# Altium PCB USBgpib-V3-USBTMC-nomouse.PcbDoc
Units mm, origin at the board's own origin, x right, y up, seen from the top; angles counter-clockwise.
Board outline 53.38 x 15.4 mm, 4 copper layers (Top Layer, Layer 1, Layer 2, Bottom Layer), stack 1.584 mm thick; 32 components, 37 nets, 167 pads, 55 vias.
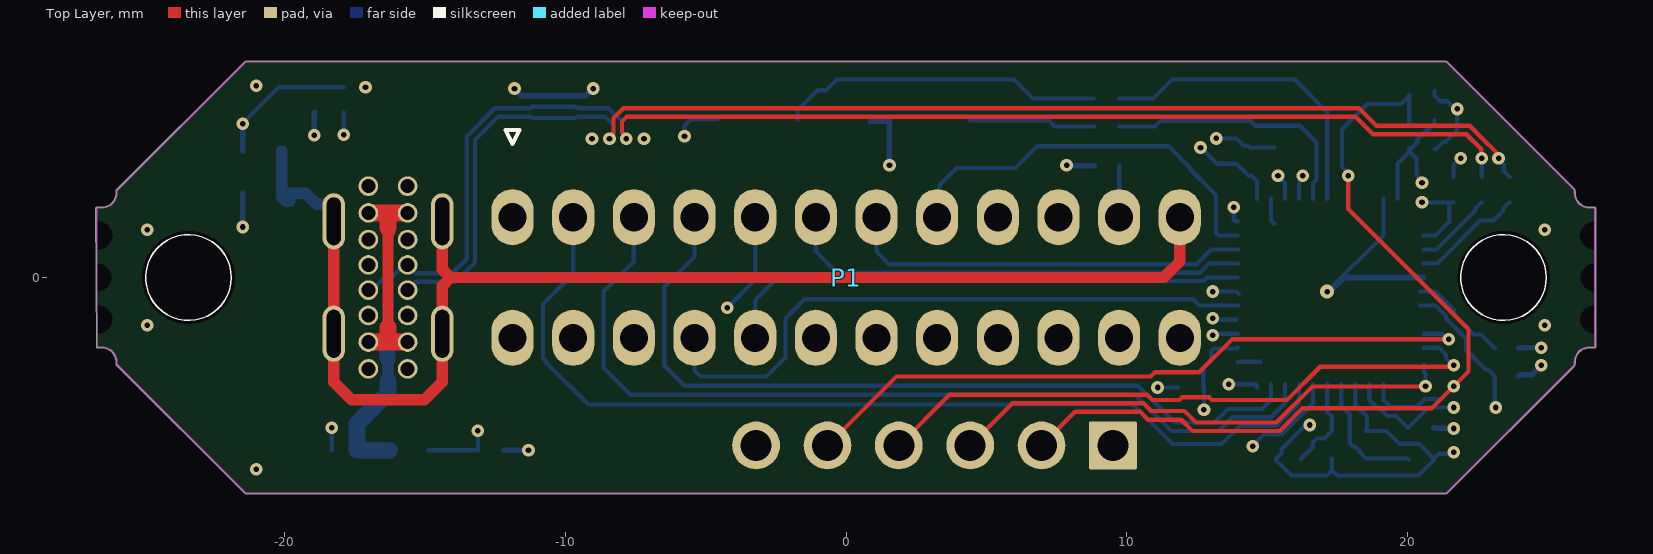
[diagram p0: Top Layer view]
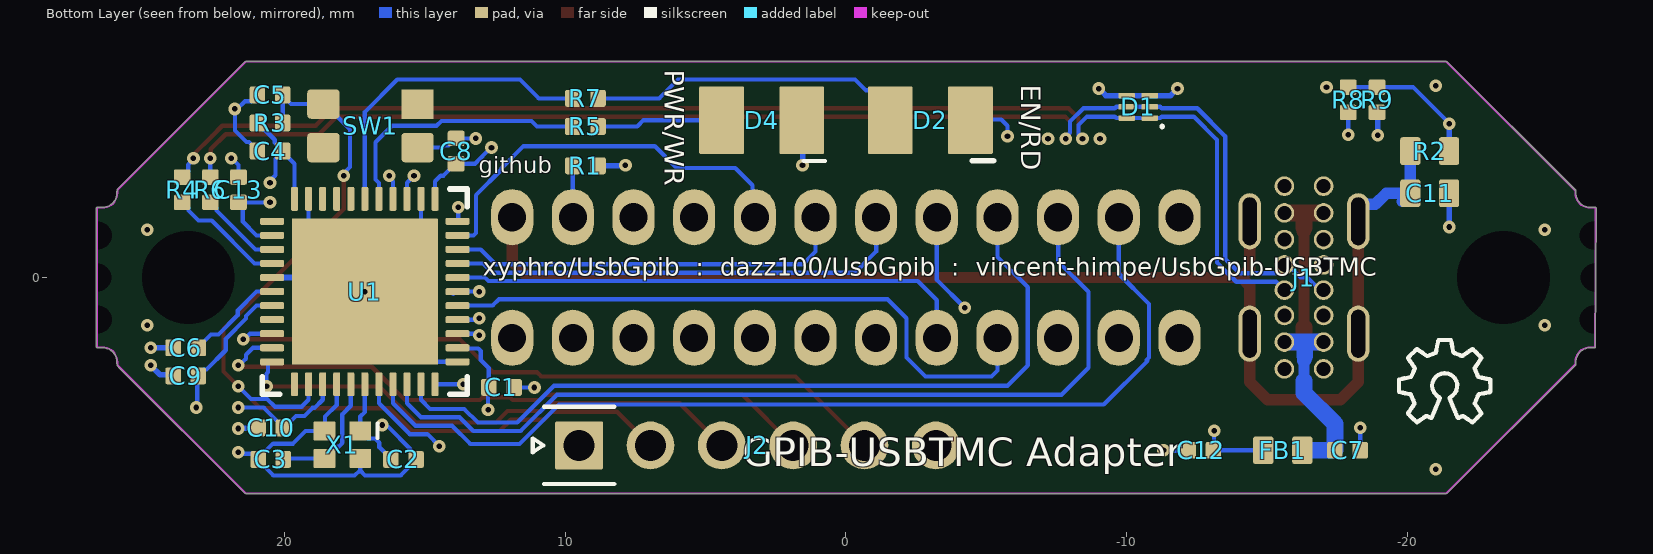
[diagram p1: Bottom Layer view, seen from below]
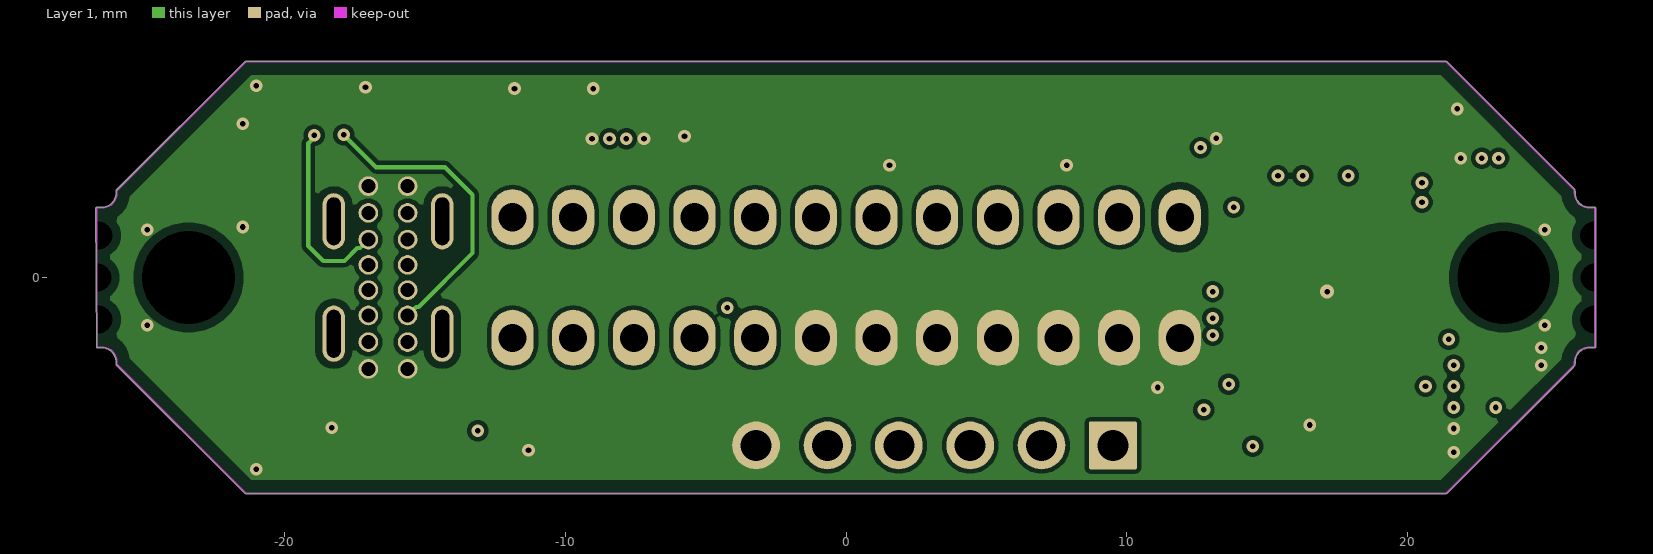
[diagram p2: Layer 1]
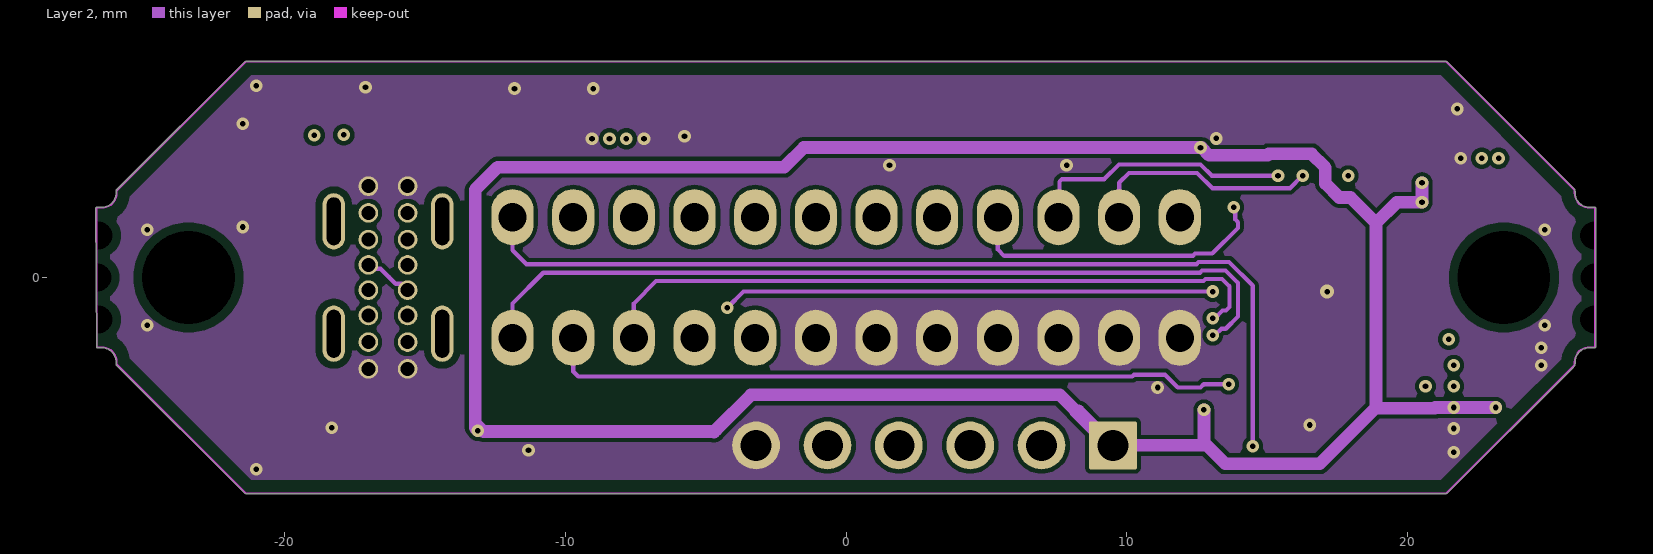
[diagram p3: Layer 2]
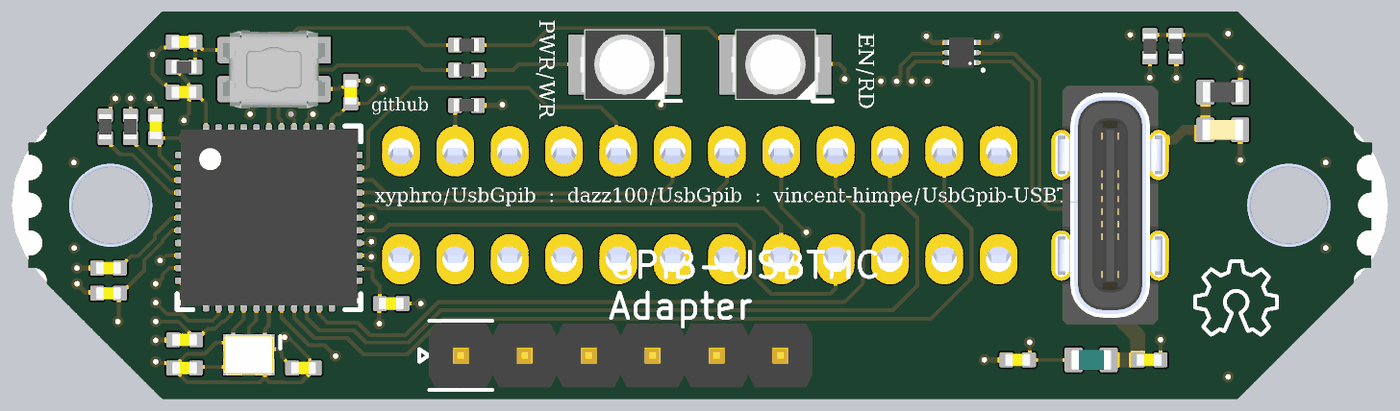
[diagram p4: 3D render of the assembled board from below, using the file's embedded part models]

## Layer stack, top to bottom
Top Solder: solder mask 0.0102, Solder Resist, Dk 3.5
Top Layer: signal copper 0.0356
Dielectric 2: prepreg 0.0711, PP-006, Dk 4.1
Layer 1: signal copper 0.035
Dielectric 1: dielectric 1.3, FR-4, Dk 4.8
Layer 2: signal copper 0.0356
Dielectric 3: prepreg 0.0711, PP-006, Dk 4.1
Bottom Layer: signal copper 0.0356
Bottom Solder: solder mask 0.0102, Solder Resist, Dk 3.5

## Board outline
-26.675,-2.5 -26.485,-2.5 cw(c-26.485,-3.008) -25.977,-3.008 -25.969,-3.109 -21.392,-7.686 -21.357,-7.7 21.357,-7.7 21.393,-7.685 25.826,-3.252 25.945,-3.133 25.952,-3.008 cw(c26.46,-3.008) 26.46,-2.5 26.65,-2.5 26.675,-2.475 26.675,2.475 26.65,2.5 26.46,2.5 cw(c26.46,3.008) 25.952,3.008 25.945,3.133 21.392,7.686 21.357,7.7 -21.357,7.7 -21.393,7.685 -25.97,3.108 -25.977,3.008 cw(c-26.485,3.008) -26.485,2.5 -26.675,2.5 -26.7,2.475

## Design rules (kind name [scope] priority, off if disabled: settings)
Clearance Clearance_3 [InPolygon vs IsThruPin AND (PadIsPlated = FALSE)] p1: gap=0.3 ignorepadtopadclearanceinfootprint=FALSE
Clearance Clearance_2 [InNet('SHIELD')] p2: gap=0.25 ignorepadtopadclearanceinfootprint=FALSE
Clearance Clearance_1 [All vs IsKeepOut] p3: gap=0.45 ignorepadtopadclearanceinfootprint=FALSE
Clearance [All] p4: gap=0.15 ignorepadtopadclearanceinfootprint=FALSE
HoleSize [All] p1: absolutevalues=TRUE maxlimit=10 minlimit=0.025 maxpercent=80.000 minpercent=20.000
MinimumSolderMaskSliver [All] p1: minsoldermaskwidth=0.075
PolygonConnect [All] p1: connectstyle=Direct reliefconductorwidth=0.254 reliefentries=4 polygonreliefangle="90 Angle" airgapwidth=0.254
RoutingVias [All] p1: holewidth=0.2 width=0.45 viastyle="Through Hole" minholewidth=0.2 minwidth=0.45 maxholewidth=0.5 maxwidth=1
SilkToSilkClearance [All] p1: silktosilkclearance=0.15
SilkToSolderMaskClearance [IsPad] p1: minsilkscreentomaskgap=0.1 clearancetoexposedcopper=TRUE
SolderMaskExpansion [All] p1: expansion=0.102 istentingtop=FALSE
SupplyNets "Schematic Supply Nets_4" [InNet('5VP')] p1: voltage=0.000
SupplyNets "Schematic Supply Nets_3" [InNet('SHIELD')] p2: voltage=0.000
SupplyNets "Schematic Supply Nets_2" [InNet('VBUS')] p3: voltage=0.000
SupplyNets "Schematic Supply Nets" [InNet('GND')] p4: voltage=0.000
Width [All] p1: maxlimit=10 minlimit=0.15 preferedwidth=0.15
26 further rules are at their usual default settings.

## Components (designator, comment, footprint, x,y, rotation, side; value= is the part's Value field where it differs from the comment)
C1 "CAP0402" CAPC0402 12.264,-3.912 r180 bottom
C2 "CAP0603" CAPC0402 15.75,-6.475 r180 bottom
C3 "CAP0603" CAPC0402 20.475,-6.475 r0 bottom
C4 "CAP0402" CAPC0402 20.5,4.5 r0 bottom locked
C5 "CAP0402" CAPC0402 20.5,6.5 r0 bottom locked
C6 "CAP0402" CAPC0402 23.5,-2.5 r0 bottom locked
C7 "CAP0402" CAPC0402 -17.85,-6.15 r180 bottom
C8 "CAP0402" CAPC0402 13.875,4.5 r90 bottom locked
C9 "CAP0402" CAPC0402 23.5,-3.5 r0 bottom locked
C10 "CAP0402" CAPC0402 20.475,-5.35 r0 bottom
C11 "CAP0603" CAPC0603 -20.775,3 r180 bottom
C12 "CAP0402" CAPC0402 -12.625,-6.15 r0 bottom
C13 "CAP0402" CAPC0402 21.625,3.125 r90 bottom locked
D1 "CDDFN6-3312P" SON40P100X50-6L -10.4,6.075 r0 bottom
D2 "LED-PLCC2-GREEN" LED-PLCC2-GREEN -3,5.6 r0 bottom locked
D4 "LED-PLCC2-BLUE" LED-PLCC2-BLUE 3,5.6 r0 bottom locked
FB1 "FB0603" FB0603 -15.55,-6.15 r0 bottom value=1KZ
J1 "CONN-USBC-USB2-VERT" CONN-CUI-UJ20-C-V-C-3-SMT-TR -16.3,0 r90 bottom locked
J2 "CONN-HEADER-PIN-1X6" HEADER-1X6 3.15,-5.975 r180 bottom
P1 "CONN-NORCOMP-111-024-113R00" CONN-NORCOMP-111-024-113L001 0.006,0 r180 top locked
R1 "RESC0402" RESC0402 9.275,3.975 r180 bottom value=100K
R2 "RESC0603" RESC0603 -20.775,4.5 r180 bottom value=4K7
R3 "RESC0402" RESC0402 20.5,5.5 r180 bottom locked value=10K
R4 "RESC0402" RESC0402 23.625,3.125 r270 bottom locked value=27R
R5 "RESC0402" RESC0402 9.275,5.375 r180 bottom value=1K
R6 "RESC0402" RESC0402 22.625,3.125 r270 bottom locked value=27R
R7 "RESC0402" RESC0402 9.275,6.375 r180 bottom value=1K
R8 "RESC0402" RESC0402 -17.875,6.325 r90 bottom value=5K1
R9 "RESC0402" RESC0402 -18.9,6.325 r90 bottom value=5K1
SW1 "SWITCH-PANASONIC-EVP-AA202K" SWITCH-PANASONIC-EVP-AA202K 16.925,5.4 r0 bottom locked
U1 "ATMEGA32U4-MUR" QFN50P700X700X-44-TH520X520 17.125,-0.5 r180 bottom
X1 "16MHz" XOSC-YXC-2016 17.925,-5.95 r0 bottom

## Footprints (in the part's own frame and the unit in brackets; to place one, negate y for a bottom-side part, rotate by r counter-clockwise, add the part's x,y. Pads: shape width x height; smd on the part's side, far side on the other; paste and mask are expansions set on the pad)
CAPC0402 [mm] "CAPACITOR, CHIP 0402 (1005) 0.5MM THICK"
  rrect25% 0.55x0.6 smd paste+0 mask+0.075: 1(-0.45,0) 2(0.45,0)
  body extent -0.51,-0.25 0.51,0.26, height 0.52
CAPC0603 [mm] "CAPACITOR, CHIP 0603 (1608) 0.5MM THICK"
  rrect25% 0.72x0.99 smd paste+0 mask+0.075: 1(-0.69,0) 2(0.69,0)
  body extent -0.81,-0.41 0.81,0.41, height 0.51
CONN-CUI-UJ20-C-V-C-3-SMT-TR [mm] "CONN,USB-C,VERTICAL,TH"
  oval 2x0.8 hole 0.5 slot 1.7 at 0 deg paste-2539.97 mask+0.05: 1(-2,1.93) 2(2,1.93) 3(2,-1.93) 4(-2,-1.93)
  round 0.7 hole 0.5 paste-2539.97 mask+0.05: A1(-3.25,0.7) A4(-2.3,0.7) A5(-1.35,0.7) A6(-0.45,0.7) A7(0.45,0.7) A8(1.35,0.7) A9(2.3,0.7) A12(3.25,0.7) B1(3.25,-0.7) B4(2.3,-0.7) B5(1.35,-0.7) B6(0.45,-0.7) B7(-0.45,-0.7) B8(-1.35,-0.7) B9(-2.3,-0.7) B12(-3.25,-0.7)
  body extent -4.75,-2.08 4.75,2.08, height 10.5
CONN-NORCOMP-111-024-113L001 [mm] "GPIB MALE VERT"
  oval 1.5x2 hole 1 paste-2539.97 mask+0.05: 1(11.874,-2.146) 2(9.716,-2.146) 3(7.556,-2.146) 4(5.397,-2.146) 5(3.239,-2.146) 6(1.08,-2.146) 7(-1.079,-2.146) 8(-3.238,-2.146) 9(-5.397,-2.146) 10(-7.556,-2.146) 11(-9.716,-2.146) 12(-11.874,-2.146) 13(11.874,2.146) 14(9.716,2.146) 15(7.556,2.146) 16(5.397,2.146) 17(3.238,2.146) 18(1.079,2.146) 19(-1.08,2.146) 20(-3.239,2.146) 21(-5.397,2.146) 22(-7.556,2.146) 23(-9.716,2.146) 24(-11.874,2.146)
  round 0 hole 3.3 unplated paste-2539.97 mask+0.15: ME1(23.406,0) ME2(-23.406,0)
  silkscreen extent 11.63,-5.25 12.12,-4.75, body extent -27.32,-7.65 27.33,7.65, height 14.81
FB0603 [mm] "FERRITE BEAD 0603 (1608)"
  rrect25% 0.72x0.99 smd mask+0.075: 1(-0.69,0) 2(0.7,0)
  body extent -0.8,-0.4 0.8,0.4, height 0.95
HEADER-1X6 [mm]
  rrect5% 1.7x1.7 hole 1.1 mask+0.05: 1(-6.35,0)
  round 1.7 hole 1.1 mask+0.05: 2(-3.81,0) 3(-1.27,0) 4(1.27,0) 5(3.81,0) 6(6.35,0)
  silkscreen extent -8,-1.38 -5.1,1.38, body extent -7.62,-1.27 7.62,1.27, height 8.55
LED-PLCC2-BLUE [mm] "SMD Mono-color TOP LED, body 3.2x2.8mm"
  rrect6% 1.6x2.4 smd mask+0.05: 1(-1.425,0) 2(1.425,0)
  silkscreen extent -2.25,1.45 -1.5,1.45, body extent -1.75,-1.4 1.75,1.4, height 1.9
LED-PLCC2-GREEN [mm] "SMD Mono-color TOP LED, body 3.2x2.8mm"
  rrect6% 1.6x2.4 smd mask+0.05: 1(-1.425,0) 2(1.425,0)
  silkscreen extent -2.25,1.45 -1.5,1.45, body extent -1.75,-1.4 1.75,1.4, height 1.9
QFN50P700X700X-44-TH520X520 [mm] "QFN, 44-Leads, Body 7.00x7.00mm, Pitch 0.50mm, Thermal Pad 5.20x5.20mm, IPC High Density"
  rrect40% 0.85x0.25 smd mask+0.05: 1(-3.3,2.5) 2(-3.3,2) 3(-3.3,1.5) 4(-3.3,1) 5(-3.3,0.5) 6(-3.3,0) 7(-3.3,-0.5) 8(-3.3,-1) 9(-3.3,-1.5) 10(-3.3,-2) 11(-3.3,-2.5) 23(3.3,-2.5) 24(3.3,-2) 25(3.3,-1.5) 26(3.3,-1) 27(3.3,-0.5) 28(3.3,0) 29(3.3,0.5) 30(3.3,1) 31(3.3,1.5) 32(3.3,2) 33(3.3,2.5)
  rrect40% 0.25x0.85 smd mask+0.05: 12(-2.5,-3.3) 13(-2,-3.3) 14(-1.5,-3.3) 15(-1,-3.3) 16(-0.5,-3.3) 17(0,-3.3) 18(0.5,-3.3) 19(1,-3.3) 20(1.5,-3.3) 21(2,-3.3) 22(2.5,-3.3) 34(2.5,3.3) 35(2,3.3) 36(1.5,3.3) 37(1,3.3) 38(0.5,3.3) 39(0,3.3) 40(-0.5,3.3) 41(-1,3.3) 42(-1.5,3.3) 43(-2,3.3) 44(-2.5,3.3)
  rrect1% 5.2x5.2 smd mask+0.05: 45(0,0)
  silkscreen extent -3.65,-3.65 3.65,3.65, body extent -3.52,-3.52 3.52,3.52, height 1
RESC0402 [mm] "RESISTOR, CHIP 0402 (1005)"
  rrect25% 0.55x0.6 smd paste+0 mask+0.075: 1(-0.45,0) 2(0.45,0)
  body extent -0.5,-0.25 0.5,0.25, height 0.27
RESC0603 [mm] "RESISTOR, CHIP 0603 (1608)"
  rrect25% 0.72x0.99 smd paste+0 mask+0.075: 1(-0.69,0) 2(0.69,0)
  body extent -0.8,-0.4 0.8,0.4, height 0.37
SON40P100X50-6L [mm] "SON, 6-Leads, Body 1.20x1.00mm, Pitch 0.40mm, IPC High Density"
  rrect50% 0.6x0.2 smd mask+0.05: 1(-0.41,0.4) 2(-0.41,0) 3(-0.41,-0.4) 4(0.41,-0.4) 5(0.41,0) 6(0.41,0.4)
  silkscreen extent -0.9,0.65 -0.8,0.75, body extent -0.55,-0.6 0.55,0.6, height 0.5
SWITCH-PANASONIC-EVP-AA202K [mm] "SWITCH-PANASONIC-EVP-AA202K"
  rect 1.15x1.05 smd mask+0.075: 1(-1.675,-0.775)
  rrect25% 1.15x1.05 smd mask+0.075: 2(1.675,-0.775) 3(1.675,0.775) 4(-1.675,0.775)
  body extent -2.15,-1.55 2.15,1.55, height 1.71
XOSC-YXC-2016 [mm] "YSO110TR"
  rrect10% 0.775x0.675 smd paste+0 mask+0.05: 1(-0.637,-0.487) 2(0.637,-0.487) 3(0.637,0.488) 4(-0.637,0.487)
  silkscreen extent -1.25,-0.75 -1.25,-0.24, body extent -1,-0.8 1,0.8, height 0.76

## Part data
C1 C4 C5 C10: library part CAPC-0402-100nF-16V-X7R, "CAPACITOR,CERAMIC,100nF,16V,X7R,0402", Capacitance=100nF, Dielectric=X7R, LCSC=C60474, Package / Case=0402, Supplier Part Number 1=1292-1630-1-ND, Voltage=16V, Supplier 1=Digikey
C2 C3: library part CAPC-0402-15PF-50V-C0G, "CAPACITOR,CERAMIC,15pF,50V,C0G,0402", Capacitance=15pF, Dielectric=C0G, LCSC=C3906764, Package / Case=0402, Supplier Part Number 1=311-3780-1-ND, Voltage=50V, Supplier 1=Digikey
C6: library part CAPC-0402-1u-10V-X7R, "CAPACITOR,CERAMIC,1uF,10V,X7R,0402", Capacitance=1uF, Dielectric=X7R, LCSC=C528974, Package / Case=0603, Supplier Part Number 1=81-GRM155Z71A105KE1D, Voltage=10V, Supplier 1=Mouser
C7 C8 C9 C12 C13: library part CAPC-0402-4u7-10V-X5R, "CAPACITOR,CERAMIC,4u7,10V,X5R,0402", Capacitance=4u7, Dielectric=X5R, LCSC=C1705, Package / Case=0603, Supplier Part Number 1=1276-1482-1-ND, Voltage=10V, Supplier 1=Digikey
C11: library part CAPC-0603-1nF-250V-X7R, "CAPACITOR,CERAMIC,1nF,250V,X7R,0603", Capacitance=1nF, Dielectric=X7R, LCSC=C277510, Package / Case=0603, Supplier Part Number 1=311-4104-1-ND, Voltage=250V, Supplier 1=Digikey
D1: library part TVS-BOURNS-CDDFN6-3312P, "TVS,USB,BOURNS,CDDFN6-3312P", LCSC=C3700524
D2: "LED,GREEN,PLCC2", LCSC=C5248446, Supplier Part Number 1=475-LGT67K-H2K1-24-ZCT-ND, Supplier 1=Digikey
D4: "LED,BLUE,PLCC2", LCSC=C6323026, Supplier Part Number 1=78-VLMB41P1Q2-GS18, Supplier 1=Mouser
FB1: library part FB0603-1KZ-0R2, "FERRITE,1KZ@100MHz,0R2DC,0603", LCSC=C160982, Supplier Part Number 1=BLM18KG102SN1D, Supplier 1="Arrow Electronics"
J1: "CONN,USB-C,VERTICAL,TH"
J2: "CONN,PINHEADER,1X6,2.45MM,VERT,GOLD"
P1: "CONN,GPIB,24P,VERT,TH", Supplier Part Number 1=1024RMA-ND, Supplier 1=Digikey
R1: library part RESC-0402-100K-1%-1/10W, "RESISTOR,100K,1%,63mW,0402 (1005)", LCSC=C60491, Power=1/16W, Supplier Part Number 1=3068008, Tolerance=1%, Supplier 1="Future Electronics"
R2: library part RESC-0603-4K7-1%-1/10W, "RESISTOR,4K7,1%,100mW,0603 (1608)", LCSC=C99782, Power=1/10W, Supplier Part Number 1=5489695, Tolerance=1%, Supplier 1="Future Electronics", Supplier 2=Digikey, Supplier 3=Digikey, Supplier 4=Avnet, Supplier Part Number 2=P4.70KHCT-ND, Supplier Part Number 3=RMCF0603FT4K70CT-ND, Supplier Part Number 4=1622960-1
R3: library part RESC-0402-10K-1%-1/10W, "RESISTOR,10K,1%,63mW,0402 (1005)", LCSC=C60490, Power=1/16W, Supplier Part Number 1=3388022, Tolerance=1%, Supplier 1="Future Electronics"
R4 R6: library part RESC-0402-27R-1%-1/10W, "RESISTOR,27R,1%,63mW,0402 (1005)", LCSC=C138021, Power=1/16W, Supplier Part Number 1=2577120, Tolerance=1%, Supplier 1="Future Electronics"
R5 R7: library part RESC-0402-1K-1%-1/10W, "RESISTOR,1K,1%,63mW,0402 (1005)", LCSC=C106235, Power=1/16W, Supplier Part Number 1=7825607, Tolerance=1%, Supplier 1="Future Electronics"
R8 R9: library part RESC-0402-5K1-1%-1/10W, "RESISTOR,5K1,1%,63mW,0402 (1005)", LCSC=C105872, Power=1/16W, Supplier Part Number 1=6053649, Tolerance=1%, Supplier 1="Future Electronics"
SW1: "SW,SMD,TACT,4PIN,2.9X3.5,4PIN", LCSC=C483888, Supplier Part Number 1=667-EVP-AA202K, Supplier 1=Mouser
U1: library part IC-ATMEL-ATMEGA32U4-QFN, "IC,CPU,ATMEG32U4-MU,QFN44", LCSC=C45874
X1: library part XTAL-YXC-XL7EL89COI-111YLC-16M, "XTAL,16MHz,2016,4P", LCSC=C2965579, Frequency=16MHz

## Free pads (board coordinates)
  round 0 hole 1 unplated paste-2539.97 mask+0.05: MB2(-26.65,0) MB2(-26.6,-1.5) MB2(-26.6,1.5) MB2(26.625,-1.5) MB2(26.625,1.5) MB2(26.65,0)

## Via types
v1: diameter 0.45, hole 0.2, Top Layer to Bottom Layer, tented both sides, 54 vias
v2: diameter 0.5, hole 0.2, Top Layer to Bottom Layer, 1 vias

## Nets (pads, with @x,y where several pads share a name; then routed paths per layer and width w, separated by ;. In a path a pad name is that pad's centre, name@x,y a point inside that pad or via, vN(x,y) a via of type N, cw(c..) or ccw(c..) an arc to the next point about the centre after c; other vN are vias at no path point)
5VP: C1.1 C4.1 C8.1 C9.1 C10.1 C12.1 C13.1 FB1.2 J2.1 R3.1 U1.2 U1.7 U1.14 U1.24 U1.34 U1.44 | length 120.2
  Layer 2 w0.45: v1(-13.1,-5.45) -13.2,-5.35 -13.2,3.125 -12.4,3.925 -2.2,3.925 -1.5,4.625 v1(12.616,4.625) 12.651,4.625 12.926,4.35 15.004,4.35 15.054,4.4 16.571,4.4 17.025,3.946 17.062,3.909 17.062,3.341 17.554,2.85 17.954,2.85 18.865,1.94 ; v1@-13.1,-5.282 -12.9,-5.482 -4.718,-5.482 ; -4.7,-5.5 -4.6,-5.4 -4.6,-5.395 -3.379,-4.174 7.609,-4.174 8.185,-4.75 ; J2.1@10.075,-6.55 J2.1 ; v1(12.739,-4.713) 12.739,-5.975 J2.1 ; 12.818,-5.95 13.492,-6.625 16.865,-6.625 18.865,-4.625 ; v1(20.5,3.375) v1(20.5,2.675) 19.6,2.675 18.865,1.94 ; v1(23.125,-4.625) v1(21.625,-4.625) 20.971,-4.625 20.946,-4.65 18.89,-4.65 18.865,-4.625 ; 8.185,-4.75 8.275,-4.75 J2.1 ; 8.185,-4.75 8.161,-4.75 9.386,-5.975 J2.1 ; 18.865,-4.625 18.865,1.94
  Bottom Layer w0.15: FB1.2 -13.1,-6.15 v1(-13.1,-5.45) ; v1(12.616,4.625) 12.634,4.625 13.209,4.05 C8.1 13.9,4.05 14.325,3.625 14.425,3.625 14.625,3.425 U1.34 ; C1.1 12.714,-3.222 13,-2.936 13,-2.614 13.088,-2.526 13.924,-2.526 U1.24@13.95,-2.5 ; v1@12.739,-4.7 C1.1@12.739,-3.9 ; U1.14 18.625,-4.351 18.912,-4.638 18.987,-4.638 19.274,-4.925 19.574,-4.925 19.999,-5.351 20.725,-4.625 v1(21.625,-4.625) ; U1.44 19.625,4.05 C4.1@20.05,4.475 ; C4.1 C4.1@20.05,4.475 ; C4.1@20.05,4.6 20.125,4.6 20.332,4.807 20.332,4.902 20.706,5.275 20.75,5.275 20.95,5.475 R3.1@20.95,5.6 ; U1.7 20.976,-1 21.35,-1.374 21.35,-1.464 22.075,-2.189 22.075,-2.59 22.76,-3.275 22.85,-3.275 23.05,-3.475 C9.1 23.088,-3.537 23.088,-4.587 v1(23.125,-4.625) ; v1(20.5,2.675) C13.1 ; v1(20.5,3.375) 20.5,3.438 20.3,3.638 20.3,4.225 C4.1@20.05,4.475 ; U1.2@20.55,1.5 20.976,1.5 21.469,1.993 21.469,2.519 C13.1@21.456,2.531
ATN: P1.11 R1.1 U1.37 | length 11
  Layer 2 w0.15: P1.11 9.722,3.371 10.072,3.721 12.495,3.721 13.041,3.175 15.8,3.175 v1(16.25,3.625)
  Bottom Layer w0.15: P1.11 9.725,2.15 R1.1 ; U1.37 16.125,3.419 16.25,3.544 v1(16.25,3.625)
DAV: P1.6 U1.30 | length 16.7
  Bottom Layer w0.15: P1.6 -1.073,0.921 -0.323,0.171 12.595,0.171 12.924,0.5 U1.30@13.95,0.5
DIO1: P1.1 U1.18 | length 37.3
  Layer 2 w0.15: P1.1 -11.868,0.968 -11.371,0.471 12.471,0.471 12.55,0.55 13.635,0.55 14.475,-0.29 v1(14.475,-6)
  Bottom Layer w0.15: v1(14.475,-6) 14.9,-5.575 15.526,-5.575 16.625,-4.476 U1.18
DIO2: P1.2 U1.19 | length 35
  Bottom Layer w0.15: -10.732,-2.965 -9.173,-4.524 10.215,-4.524 11.617,-5.925 13.37,-5.925 14.02,-5.275 15.326,-5.275 16.125,-4.476 U1.19 ; -10.7,-2.965 -10.7,-2.932 -10.789,-2.843 -10.789,-0.947 -9.709,0.132 P1.2
DIO3: P1.3 U1.20 | length 32.1
  Bottom Layer w0.15: P1.3 -7.55,0.575 -8.63,-0.505 -8.63,-3.211 -7.667,-4.174 10.29,-4.174 11.578,-5.462 13.266,-5.462 13.753,-4.975 15.126,-4.975 15.625,-4.476 U1.20
DIO4: P1.4 U1.21 | length 29
  Bottom Layer w0.15: P1.4 -5.391,0.734 -6.471,-0.346 -6.471,-3.124 -5.745,-3.85 10.39,-3.85 11.703,-5.162 13.102,-5.162 13.589,-4.675 14.801,-4.675 15.125,-4.351 U1.21
DIO5: P1.13 U1.25 | length 31
  Layer 2 w0.15: P1.13 -11.868,-0.921 -10.776,0.171 12.595,0.171 12.674,0.25 13.511,0.25 13.95,-0.189 13.95,-1.386 13.514,-1.822 13.359,-1.822 13.131,-2.05 v1(13.05,-2.05)
  Bottom Layer w0.15: v1(13.05,-2.05) 13.1,-2 U1.25@13.95,-2
DIO6: P1.14 U1.22 | length 25.9
  Layer 2 w0.15: P1.14 -9.709,-3.341 -9.529,-3.521 10.188,-3.521 10.246,-3.463 11.356,-3.463 11.806,-3.912 12.619,-3.912 12.731,-3.8 v1(13.625,-3.8)
  Bottom Layer w0.15: v1(13.625,-3.8) 14.575,-3.8 14.625,-3.85 U1.22@14.625,-3.912
DIO7: P1.15 U1.26 | length 25.3
  Layer 2 w0.15: P1.15 -7.55,-0.921 -6.758,-0.129 12.719,-0.129 12.798,-0.05 13.386,-0.05 13.65,-0.314 13.65,-1.05 13.521,-1.179 13.402,-1.179 13.131,-1.45 v1(13.05,-1.45)
  Bottom Layer w0.15: v1(13.05,-1.45) 13.1,-1.5 U1.26@13.9,-1.5
DIO8: P1.16 U1.27 | length 22.6
  Bottom Layer w0.15: P1.16 -5.391,-3.309 -5.179,-3.521 -2.831,-3.521 -2.153,-2.843 -2.153,-1.449 -1.475,-0.771 12.347,-0.771 12.575,-1 U1.27@13.95,-1
DN: R6.2 U1.3 | length 2.8
  Bottom Layer w0.15: U1.3@20.55,1 21.015,1 22.4,2.385 22.4,2.475 22.6,2.675 R6.2
DP: R4.2 U1.4 | length 4
  Bottom Layer w0.15: U1.4@20.55,0.5 21.048,0.5 22.573,2.025 23.04,2.025 23.4,2.385 23.4,2.475 23.6,2.675 R4.2
EOI: P1.5 U1.28 | length 22.1
  Layer 2 w0.15: v1(-4.225,-1.075) -3.65,-0.5 v1(13.05,-0.5)
  Bottom Layer w0.15: v1(-4.225,-1.075) -3.232,-0.082 P1.5 ; v1(13.05,-0.5) 13.9,-0.5 U1.28@13.975,-0.575
GND: C1.2 C2.2 C3.2 C4.2 C5.2 C6.2 C7.2 C8.2 C9.2 C10.2 C11.2 C12.2 C13.2 D1.3 D1.4 D2.1 D4.1 J1.A1 J1.A12 J1.B1 J1.B12 J2.6 P1.18 P1.19 P1.20 P1.21 P1.22 P1.23 P1.24 R1.2 R2.2 R8.2 R9.2 SW1.4 U1.5 U1.15 U1.23 U1.35 U1.43 U1.45 X1.2 X1.4 | length 48.6
  Bottom Layer w0.15: v1(-21.475,5.475) -20.175,6.775 R8.2 ; C7.2 v1(-18.3,-5.35) ; v1(-5.75,5.025) -5.75,5.4 -5.525,5.625 D2.1@-4.575,5.625 ; v1(11.089,-3.912) C1.2 ; v1(13.175,4.95) C8.2 13.9,4.95 14.15,4.7 14.29,4.7 14.365,4.625 SW1.4 ; U1.23@13.95,-3 U1.45@14.75,-3 ; U1.35 15.125,2.025 15.245,1.905 U1.45@15.25,1.905 ; C2.2 15.3,-6.5 15.85,-7.05 16.549,-7.05 16.555,-7.044 17.118,-7.044 17.288,-6.874 X1.4 ; C2.2@15.3,-6.45 15.5,-6.25 15.5,-6.11 16.303,-5.307 16.443,-5.307 v1(16.5,-5.25) ; v2(17.125,-0.5) 19.125,1.5 U1.43 ; 17.3,-6.862 17.488,-7.05 18.716,-7.05 ; U1.15 18.125,-4.535 18.54,-4.95 18.54,-5.436 18.512,-5.463 19.232,-5.463 19.682,-5.913 20.387,-5.913 20.925,-6.45 20.925,-6.5 20.381,-7.044 18.716,-7.044 ; C3.2@20.9,-6.475 21.103,-6.272 21.578,-6.272 v1(21.625,-6.225) ; C4.2@20.95,4.575 21,4.575 21.25,4.825 21.34,4.825 21.75,5.235 v1(21.75,6) 21.669,6 21.394,6.275 21.15,6.275 20.95,6.475 C5.2@20.95,6.65 ; C13.2 21.625,4 v1(21.875,4.25)
  Bottom Layer w0.2: v1(-21.475,1.8) -21.465,1.81 C11.2 ; v1(-21.475,5.475) -21.475,4.51 R2.2 ; C12.2 v1(-11.3,-6.15) ; v1(-11.8,6.725) -11.55,6.475 D1.3 D1.4 -9.25,6.475 v1(-9,6.725) ; D4.1@0.875,5.558 1.533,5.558 D4.1 1.54,5.565 1.54,4.01 v1(1.55,4) ; v1(7.85,4) 7.875,3.975 R1.2 ; U1.45@17.225,-0.5 17.75,0 U1.5@20.55,0 ; C10.2 20.94,-5.365 21.615,-5.365 v1(21.625,-5.375) ; C9.2 23.983,-3.467 24.408,-3.467 v1(24.75,-3.125) ; C6.2 v1(24.75,-2.5)
  other v1: -20.988,-6.825 -24.863,-1.7 24.863,-1.7 -24.863,1.7 24.875,1.7 -9.04,4.934 -7.19,4.934 -17.1,6.775 -20.988,6.825
IFC: P1.9 U1.33 | length 11.6
  Layer 2 w0.15: P1.9 5.404,0.996 5.629,0.771 12.347,0.771 12.425,0.85 13.033,0.85 13.95,1.767 13.95,1.969 13.857,2.061 13.857,2.443 v1(13.8,2.5)
  Bottom Layer w0.15: v1(13.8,2.5) 13.8,2.05 13.85,2 U1.33@13.95,2
LBL: R5.1 U1.38 | length 9.5
  Bottom Layer w0.15: R5.1 10.998,5.375 11.198,5.575 14.396,5.575 14.571,5.4 16.164,5.4 16.75,4.814 16.75,3.489 16.625,3.364 U1.38
LGN: R7.1 U1.39 | length 11.3
  Bottom Layer w0.15: R7.1 10.932,6.375 11.607,7.05 15.97,7.05 17.125,5.895 U1.39
MISO: J2.3 U1.11 | length 18.5
  Top Layer w0.15: J2.3 5.921,-4.474 10.59,-4.474 10.866,-4.75 12.042,-4.75 12.455,-5.162 15.315,-5.162 16.602,-3.875 v1(20.625,-3.875)
  Bottom Layer w0.15: U1.11@20.575,-3.075 20.575,-3.375 20.625,-3.425 v1(20.625,-3.875)
MOSI: J2.4 U1.10 | length 22.6
  Top Layer w0.15: J2.4 3.681,-4.174 10.714,-4.174 10.903,-4.362 11.864,-4.362 11.964,-4.263 12.925,-4.263 13.025,-4.362 15.69,-4.362 16.878,-3.175 21.575,-3.175 v1(21.625,-3.125)
  Bottom Layer w0.15: U1.10@20.55,-2.5 21.101,-2.5 21.35,-2.749 21.35,-2.888 21.587,-3.125 v1(21.625,-3.125)
NDAC: P1.8 U1.32 | length 14.5
  Bottom Layer w0.15: P1.8 3.323,2.225 3.323,3.283 3.94,3.9 6.032,3.9 6.807,4.675 11.476,4.675 12.25,3.901 12.25,3.852 13.171,2.931 13.171,1.588 13.259,1.5 U1.32@13.95,1.5
NetD2_2: D2.2 R7.2 | length 11.7
  Bottom Layer w0.15: D2.2@-1.725,5.625 -1.725,5.962 -1.025,6.662 D2.2@-0.896,6.662 ; -0.767,6.662 D2.2@-0.896,6.662 ; R7.2 6.65,6.375 5.975,7.05 -0.324,7.05 -0.712,6.662 D2.2@-0.896,6.662
NetD4_2: D4.2 R5.2 | length 4.5
  Bottom Layer w0.15: D4.2 7.203,5.6 7.428,5.375 R5.2
NetJ1_A5: J1.A5 R8.1 | length 11.6
  Layer 1 w0.15: v1(-17.875,5.075) -16.725,3.925 -14.275,3.925 -13.295,2.945 -13.295,0.868 -15.207,-1.045 -15.295,-1.045 J1.A5
  Bottom Layer w0.15: v1(-17.875,5.075) R8.1
NetJ1_B5: J1.B5 R9.1 | length 7.5
  Layer 1 w0.15: v1(-18.93,5.067) -18.93,4.986 -19.141,4.776 -19.141,1.123 -18.607,0.589 -17.853,0.589 -17.394,1.048 -17.302,1.048 J1.B5
  Bottom Layer w0.2: v1(-18.93,5.067) -18.93,5.845 R9.1
NRFD: P1.7 U1.31 | length 14.5
  Bottom Layer w0.15: P1.7 1.086,0.921 1.536,0.471 12.471,0.471 13,1 U1.31@13.95,1
REN: P1.17 U1.29 | length 18.9
  Bottom Layer w0.15: P1.17 -3.232,-0.807 -2.554,-0.129 12.719,-0.129 12.848,0 U1.29@13.95,0
RESETN: C5.1 J2.2 R3.2 SW1.2 U1.13 | length 34.7
  Top Layer w0.15: J2.2 8.161,-4.774 10.466,-4.774 10.754,-5.062 11.93,-5.062 12.331,-5.462 15.439,-5.462 16.251,-4.65 20.85,-4.65 v1(21.625,-3.875) 22.155,-3.345 22.155,-1.839 17.875,2.441 v1(17.875,3.625)
  Bottom Layer w0.15: v1(17.875,3.625) 17.875,3.706 17.65,3.931 17.65,5.275 18.55,6.175 19.75,6.175 C5.1@20.05,6.475 ; U1.13 19.125,-4.351 19.374,-4.6 20.326,-4.6 20.601,-4.325 21.175,-4.325 v1(21.625,-3.875) ; R3.2 C5.1
SCK: J2.5 U1.9 | length 24.7
  Top Layer w0.15: J2.5 1.794,-3.521 10.844,-3.521 10.994,-3.371 12.565,-3.371 13.736,-2.2 v1(21.45,-2.2)
  Bottom Layer w0.15: U1.9@20.55,-2 21.212,-2 21.412,-2.2 v1(21.45,-2.2)
SHIELD: C11.1 J1.1 J1.2 J1.3 J1.4 P1.12 R2.1 | length 48.3
  Top Layer w0.4: J1.3 J1.4 -18.23,-3.722 -17.602,-4.35 -14.998,-4.35 -14.37,-3.722 J1.1 -14.37,-0.295 -14.075,0 ; J1.2 -14.37,0.295 -14.075,0 ; P1.12 11.881,0.572 11.309,0 0.872,0 -2.447,0 -14.075,0
  Bottom Layer w0.4: R2.1 C11.1 ; C11.1@-19.79,2.705 -19.925,2.705 -20.085,2.865 C11.1 ; J1.3 -18.23,2.422 -18.415,2.607 -18.837,2.607 -19.23,3 C11.1
SRQ: P1.10 U1.36 | length 10.7
  Layer 2 w0.15: P1.10@7.563,2.396 P1.10 7.6,2.184 7.6,3.412 7.688,3.5 9.192,3.5 9.714,4.021 12.619,4.021 13.015,3.625 v1(15.375,3.625)
  Bottom Layer w0.15: v1(15.375,3.625) 15.625,3.375 U1.36
UCAP: C6.1 U1.6 | length 3.6
  Bottom Layer w0.15: U1.6 20.976,-0.5 21.65,-1.174 21.65,-1.339 22.336,-2.025 22.6,-2.025 C6.1@23.1,-2.525
USB_N: D1.2 D1.5 J1.A7 J1.B7 R6.1 | length 48.2
  Top Layer w0.15: v1(-7.815,4.934) -7.815,5.012 -7.975,5.172 -7.975,5.55 -7.8,5.725 -5.689,5.725 -5.686,5.723 18.128,5.723 18.751,5.1 22.076,5.1 22.607,4.569 22.607,4.268 v1(22.625,4.25)
  Bottom Layer w0.15: J1.B7 -16.875,-0.45 -16.425,0 -16.175,0 -15.725,0.45 J1.A7 -15.3,0.15 -14.013,0.15 -13.5,0.663 -13.5,5.024 -12.499,6.025 -11.235,6.025 -11.185,6.075 D1.2 D1.5 -9.615,6.075 -9.565,6.025 -8.45,6.025 -7.975,5.55 -7.975,5.155 -7.815,4.996 v1(-7.815,4.934) ; R6.1 v1(22.625,4.25)
USB_P: D1.1 D1.6 J1.A6 J1.B6 R4.1 | length 49
  Top Layer w0.15: v1(-8.415,4.934) -8.415,5.015 -8.275,5.155 -8.275,5.674 -7.924,6.025 -5.564,6.025 -5.562,6.023 18.252,6.023 18.875,5.4 22.2,5.4 22.575,5.025 23.225,4.375 v1(23.225,4.25)
  Layer 2 w0.15: J1.B6 -16.863,0.313 -16.563,0.313 -16.275,0.025 ; -16.275,0.024 -16.026,-0.225 -15.825,-0.225 J1.A6
  Bottom Layer w0.15: J1.A6 -15.3,-0.15 -13.888,-0.15 -13.2,0.538 -13.2,4.9 -12.375,5.725 -11.235,5.725 -11.185,5.675 D1.1 D1.6 -9.615,5.675 -9.565,5.725 -8.574,5.725 -8.275,5.426 -8.275,5.074 v1(-8.415,4.934) ; v1(23.225,4.25) 23.225,4.2 23.413,4.012 23.413,3.775 23.613,3.575 R4.1
VBUS: C7.1 FB1.1 J1.A4 J1.A9 J1.B4 J1.B9 | length 14.3
  Top Layer w0.4: -16.3,-1.781 -16.3,0.425 -16.3,1.64
  Top Layer w0.515: -16.3,1.64 -16.3,1.781
  Top Layer w0.6: J1.B9 -16.3,-2.3 ; J1.B4 -16.3,2.3 ; -16.3,-1.781 -16.3,-2.3 ; -16.3,1.781 -16.3,2.3 ; J1.A4 -16.3,-2.3 ; J1.A9 -16.3,2.3
  Bottom Layer w0.4: -16.3,-3.681 -16.3,-2.96
  Bottom Layer w0.49: -16.325,-2.794 -16.325,-2.935 -16.3,-2.96
  Bottom Layer w0.6: J1.B9 -16.3,-2.3 ; -16.325,-2.794 -16.325,-2.325 -16.3,-2.3 ; -16.3,-3.681 -16.3,-4.104 -17.4,-5.204 C7.1 FB1.1 ; J1.A4 -16.3,-2.3
XI: C2.1 U1.17 X1.1 | length 4.1
  Bottom Layer w0.15: C2.1 16.2,-6.45 16.612,-6.038 16.612,-5.878 16.765,-5.725 17.026,-5.725 X1.1 17.288,-4.95 17.125,-4.787 U1.17 17.125,-4.519
XO: C3.1 U1.16 X1.3 | length 4.6
  Bottom Layer w0.15: U1.16 17.625,-4.564 17.925,-4.865 17.925,-5.042 17.925,-5.884 18.067,-6.025 18.133,-6.025 18.25,-6.142 18.25,-6.175 18.512,-6.438 19.988,-6.438 C3.1
pads on no net: J1.A8 J1.B8 P1.ME1 P1.ME2 SW1.1 SW1.3 U1.1 U1.8 U1.12 U1.40 U1.41 U1.42

## Polygon pours and split planes (outlines as drawn)
GND on Layer 1 "GND_L02_P002" (solid, remove dead copper, pour order 2): 28.15,-7.65 28.15,7.65 -27.35,7.65 -27.35,-7.65
GND on Layer 2 "GND_L03_P003" (solid, remove dead copper, pour order 3): -27.6,7.8 -27.6,-7.925 27.55,-7.925 27.55,7.95 17.725,7.95

## Keep-outs
Keep-Out Layer:
  lines w0.05: -21.375,-7.668 ccw(c-21.357,-7.65) -21.357,-7.675 ; -21.374,-7.668 ccw(c-21.357,-7.65) -21.357,-7.675 ; -21.375,-7.668 ccw(c-21.357,-7.65) -21.374,-7.668 ; -21.375,-7.668 -25.951,-3.091 -25.952,-3.008 ccw(c-26.485,-3.008) -26.485,-2.475 -26.675,-2.475 -26.675,-1 -26.675,1 -26.675,2.475 -26.485,2.475 ccw(c-26.485,3.008) -25.952,3.008 -25.952,3.09 -21.375,7.667 -21.367,7.675 -21.357,7.675 21.357,7.675 ; -21.375,-7.668 -21.375,-7.668 ; -21.375,-7.668 -21.374,-7.668 ; -21.357,-7.675 21.357,-7.675 ; 21.357,-7.675 ccw(c21.357,-7.65) 21.374,-7.668 ; 21.357,-7.675 ccw(c21.357,-7.65) 21.375,-7.668 ; 21.357,7.675 cw(c21.357,7.65) 21.374,7.668 ; 21.357,7.675 cw(c21.357,7.65) 21.375,7.668 ; 21.374,-7.668 ccw(c21.357,-7.65) 21.375,-7.668 ; 21.374,-7.668 21.375,-7.668 ; 21.374,7.668 cw(c21.357,7.65) 21.375,7.667 ; 21.374,7.668 21.375,7.668 ; 21.375,-7.668 25.809,-3.234 25.927,-3.116 25.927,-3.091 ; 21.375,-7.668 21.375,-7.668 ; 21.375,7.668 21.375,7.667 ; 21.375,7.667 25.784,3.259 25.927,3.115 25.927,3.09 ; 25.926,-3.091 ccw(c25.909,-3.073) 25.927,-3.09 ; 25.926,-3.091 25.927,-3.09 ; 25.927,-3.09 25.927,-3.008 cw(c26.46,-3.008) 26.46,-2.475 26.65,-2.475 26.65,-1 26.65,1 26.65,2.475 ; 25.927,3.09 ccw(c25.909,3.073) 25.927,3.09 ; 25.927,3.09 25.927,3.008 ccw(c26.46,3.008) 26.46,2.475 26.65,2.475 ; 26.65,2.475 ccw(c26.65,2.475) 26.65,2.475

## Silkscreen, mask and mechanical layers (free items; w line width, h text height)
Top Overlay:
  circle w0.05: c23.4,0 r1.525
  circle w0.05: c-23.4,0 r1.525
Bottom Overlay:
  drawing of 271 lines, arcs and shapes, not listed
  text "PWR/WR" at 6.685,7.393 h1.2 r90
  text "EN/RD" at -6.015,6.853 h1.2 r90
  text "github" at 13.066,3.516 h1
  text "xyphro/UsbGpib  :  dazz100/UsbGpib  :  vincent-himpe/UsbGpib-USBTMC" at 12.922,-0.143 h1.1
  text "GPIB-USBTMC Adapter" at 3.675,-6.725 h1.02
Route Tool Path:
  lines w1: -26.55,-2.975 ccw(c-25.388,-2.551) -26.264,-3.425 ; -26.55,2.975 cw(c-25.388,2.551) -26.264,3.425 ; -26.288,3.426 -21.711,8.003 ; 26.288,-3.426 21.711,-8.003 ; 26.289,-3.425 ccw(c25.413,-2.551) 26.575,-2.975 ; 26.575,2.975 ccw(c25.413,2.551) 26.289,3.425 ; -26.287,-3.427 cw(c-25.934,-3.073) -26.288,-3.426 -26.287,-3.427 ; -26.287,-3.427 -21.711,-8.003 ; -21.71,-8.004 ccw(c-21.357,-7.65) -21.357,-8.15 ; -21.711,-8.003 ccw(c-21.357,-7.65) -21.357,-8.15 ; -21.711,-8.003 -21.71,-8.004 ; -21.711,8.003 cw(c-21.357,7.65) -21.357,8.15 ; -21.711,8.003 -21.71,8.004 cw(c-21.357,7.65) -21.357,8.15 ; -21.357,-8.15 21.357,-8.15 ; -21.357,8.15 21.357,8.15 ; 21.357,-8.15 ccw(c21.357,-7.65) 21.711,-8.003 ; 21.357,-8.15 ccw(c21.357,-7.65) 21.71,-8.004 ; 21.357,8.15 cw(c21.357,7.65) 21.711,8.003 ; 21.357,8.15 cw(c21.357,7.65) 21.71,8.004 21.711,8.003 ; 21.71,-8.004 21.711,-8.003 ; 21.711,8.003 26.288,3.426 ; 26.288,3.426 cw(c25.413,2.551) 26.289,3.425 ; 26.288,3.426 cw(c25.934,3.073) 26.289,3.425

## Text inside footprints (layer, text, board x,y; h text height)
D2: Bottom Assembly "K" at -5.225,6.785 h2 r180
D4: Bottom Assembly "K" at 0.775,6.785 h2 r180
SW1: Bottom Assembly "1" at 14.675,6.7 h1 r180